# Altium PCB PCB1.PcbDoc
Units mil, origin at the board's own origin, x right, y up, seen from the top; angles counter-clockwise.
Board outline 6045 x 3600 mil, 2 copper layers (Top Layer, Bottom Layer); 64 components, 8 nets, 180 pads, 0 vias.
Unrouted connection lines stored in the file: 1.
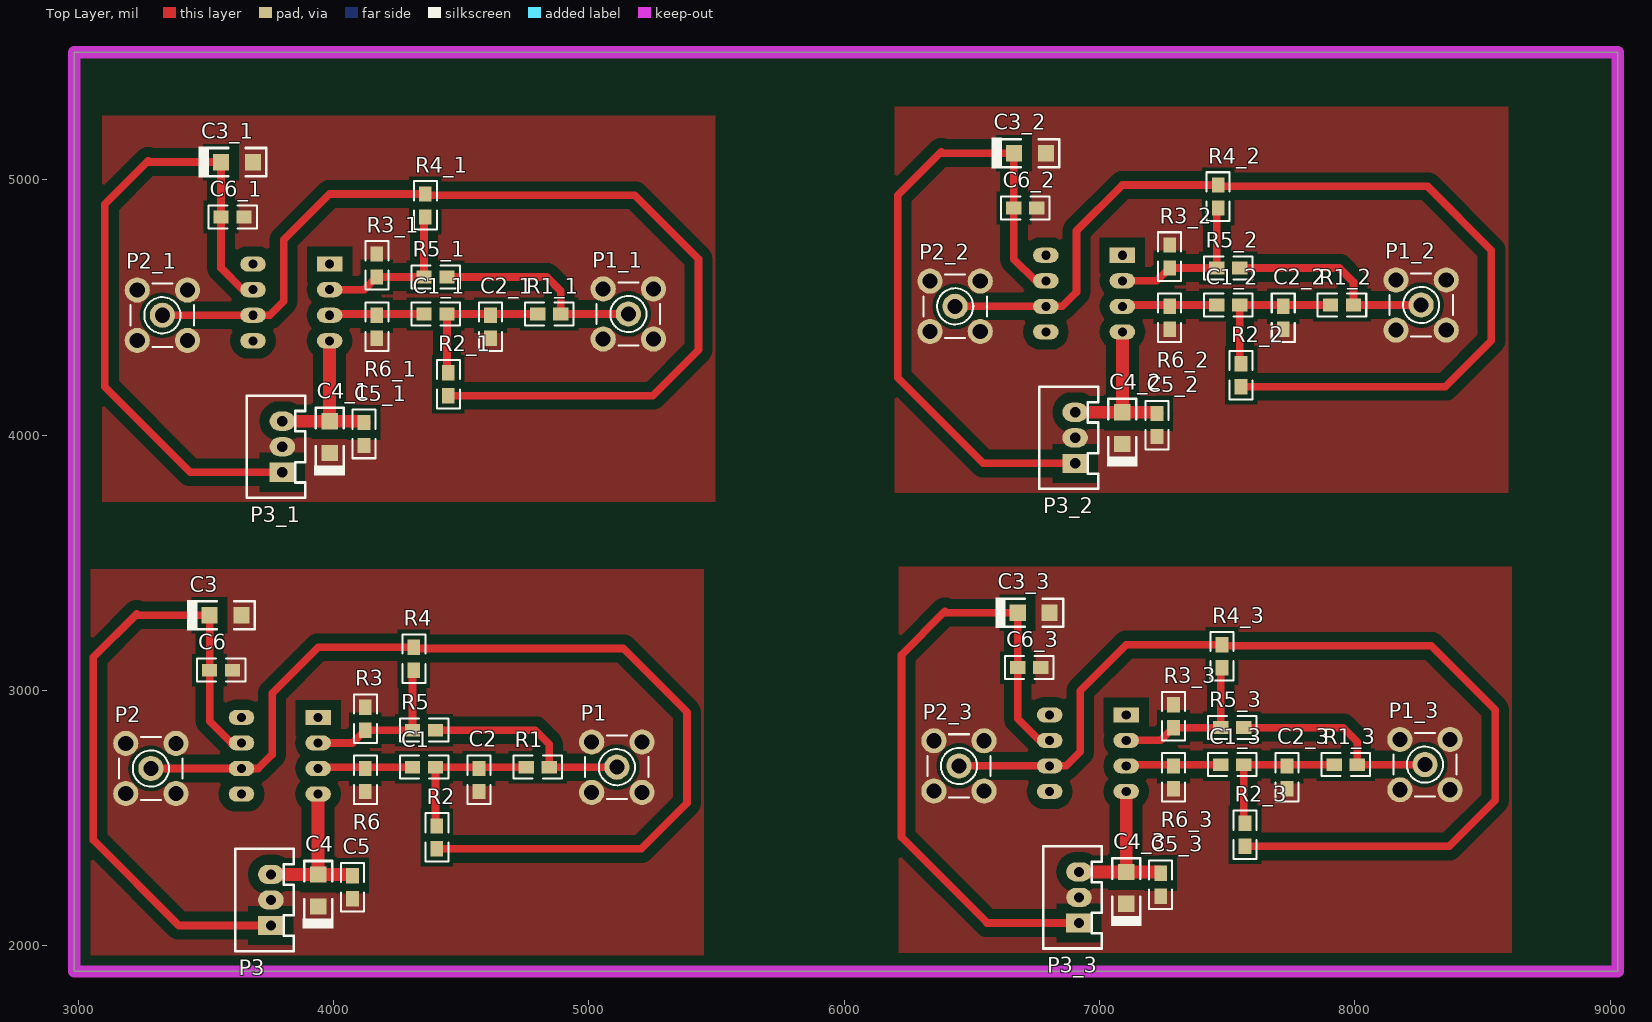
[diagram p0: Top Layer view]
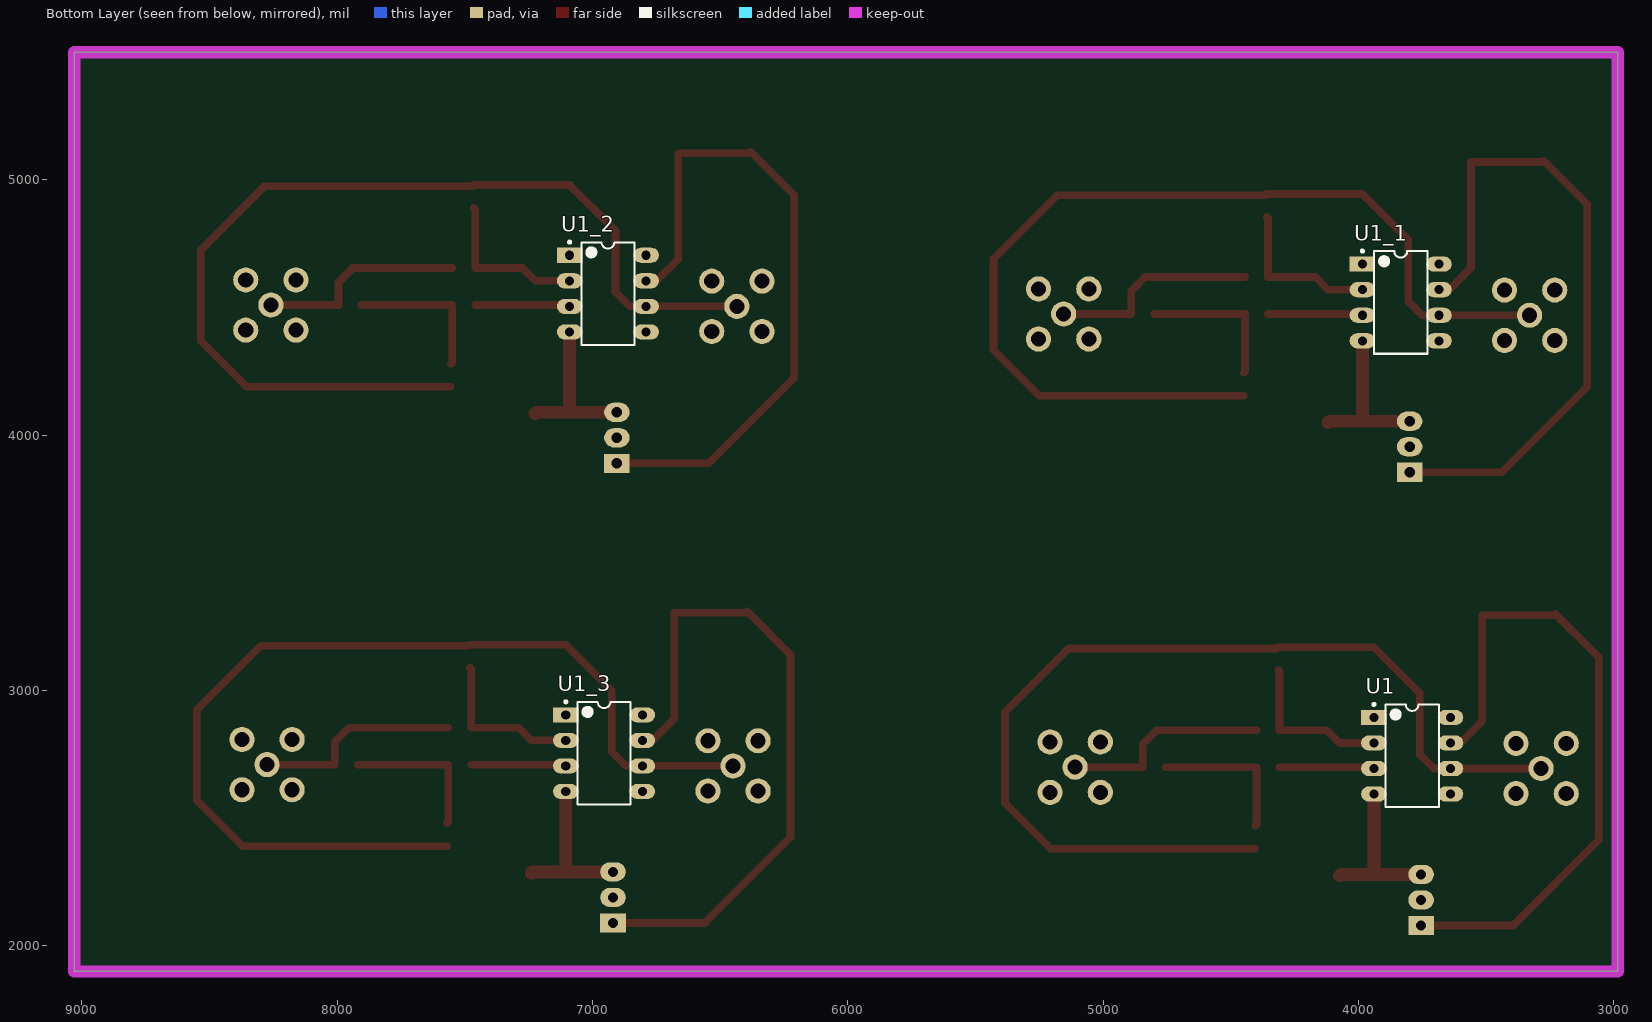
[diagram p1: Bottom Layer view, seen from below]

## Layer stack, top to bottom
Top Solder: solder mask 0.4, Solder Resist, Dk 3.5
Top Layer: signal copper 1.4
Dielectric 1: dielectric 12.6, FR-4, Dk 4.8
Bottom Layer: signal copper 1.4
Bottom Solder: solder mask 0.4, Solder Resist, Dk 3.5

## Board outline
2985,1900 2985,5500 9030,5500 9030,1900

## Design rules (kind name [scope] priority, off if disabled: settings)
Clearance [All] p1: gap=10 except(40: Arc-Fill Arc-Poly Track-Fill Track-Poly SMDPad-Fill SMDPad-Poly THPad-Fill THPad-Poly Via-Fill Via-Poly Fill-Fill Fill-Poly Poly-Poly)
PlaneConnect [All] p1: planeconnectstyle=Direct reliefexpansion=20 reliefentries=4 reliefconductorwidth=10 reliefairgap=10
PolygonConnect [All] p1: connectstyle=Direct reliefconductorwidth=10 reliefentries=4 polygonreliefangle="90 Angle" airgapwidth=10
RoutingVias [All] p1: holewidth=28 width=50 viastyle="Through Hole" minholewidth=28 minwidth=50 maxholewidth=28 maxwidth=50
SolderMaskExpansion [All] p1: expansion=4
Width [All] p1: maxlimit=100 minlimit=10 preferedwidth=10
29 further rules are at their usual default settings.

## Components (designator, comment, footprint, x,y, rotation, side; value= is the part's Value field where it differs from the comment)
C1 "0.1uf" 0805 4400,2700 r180 top
C1_1 "0.1uf" 0805 4445,4475 r180 top (schematic designator C1)
C1_2 "0.1uf" 0805 7550,4510 r180 top (schematic designator C1)
C1_3 "0.1uf" 0805 7565,2710 r180 top (schematic designator C1)
C2 "0.1uf" 0805 4570,2605 r90 top
C2_1 "0.1uf" 0805 4615,4380 r90 top (schematic designator C2)
C2_2 "0.1uf" 0805 7720,4415 r90 top (schematic designator C2)
C2_3 "0.1uf" 0805 7735,2615 r90 top (schematic designator C2)
C3 "Cap" 3216C-TYPE_A 3515,3295 r180 top
C3_1 "Cap" 3216C-TYPE_A 3560,5070 r180 top (schematic designator C3)
C3_2 "Cap" 3216C-TYPE_A 6665,5105 r180 top (schematic designator C3)
C3_3 "Cap" 3216C-TYPE_A 6680,3305 r180 top (schematic designator C3)
C4 "Cap" 3216C-TYPE_A 3940,2155 r270 top
C4_1 "Cap" 3216C-TYPE_A 3985,3930 r270 top (schematic designator C4)
C4_2 "Cap" 3216C-TYPE_A 7090,3965 r270 top (schematic designator C4)
C4_3 "Cap" 3216C-TYPE_A 7105,2165 r270 top (schematic designator C4)
C5 "0.1uf" 0805 4075,2275 r270 top
C5_1 "0.1uf" 0805 4120,4050 r270 top (schematic designator C5)
C5_2 "0.1uf" 0805 7225,4085 r270 top (schematic designator C5)
C5_3 "0.1uf" 0805 7240,2285 r270 top (schematic designator C5)
C6 "0.1uf" 0805 3515,3080 r0 top
C6_1 "0.1uf" 0805 3560,4855 r0 top (schematic designator C6)
C6_2 "0.1uf" 0805 6665,4890 r0 top (schematic designator C6)
C6_3 "0.1uf" 0805 6680,3090 r0 top (schematic designator C6)
P1 "SMB" SMB_V-RJ45 5110,2700 r0 top
P1_1 "SMB" SMB_V-RJ45 5155,4475 r0 top (schematic designator P1)
P1_2 "SMB" SMB_V-RJ45 8260,4510 r0 top (schematic designator P1)
P1_3 "SMB" SMB_V-RJ45 8275,2710 r0 top (schematic designator P1)
P2 "SMB" SMB_V-RJ45 3285,2695 r0 top
P2_1 "SMB" SMB_V-RJ45 3330,4470 r0 top (schematic designator P2)
P2_2 "SMB" SMB_V-RJ45 6435,4505 r0 top (schematic designator P2)
P2_3 "SMB" SMB_V-RJ45 6450,2705 r0 top (schematic designator P2)
P3 "XH2.54-3p" XH2.54-3p 3755,2080 r90 top
P3_1 "XH2.54-3p" XH2.54-3p 3800,3855 r90 top (schematic designator P3)
P3_2 "XH2.54-3p" XH2.54-3p 6905,3890 r90 top (schematic designator P3)
P3_3 "XH2.54-3p" XH2.54-3p 6920,2090 r90 top (schematic designator P3)
R1 "0" 0805 4845,2700 r180 top
R1_1 "0" 0805 4890,4475 r180 top (schematic designator R1)
R1_2 "0" 0805 7995,4510 r180 top (schematic designator R1)
R1_3 "0" 0805 8010,2710 r180 top (schematic designator R1)
R2 "0" 0805 4405,2470 r270 top
R2_1 "0" 0805 4450,4245 r270 top (schematic designator R2)
R2_2 "0" 0805 7555,4280 r270 top (schematic designator R2)
R2_3 "0" 0805 7570,2480 r270 top (schematic designator R2)
R3 "0" 0805 4125,2935 r270 top
R3_1 "0" 0805 4170,4710 r270 top (schematic designator R3)
R3_2 "0" 0805 7275,4745 r270 top (schematic designator R3)
R3_3 "0" 0805 7290,2945 r270 top (schematic designator R3)
R4 "0" 0805 4315,3080 r90 top
R4_1 "0" 0805 4360,4855 r90 top (schematic designator R4)
R4_2 "0" 0805 7465,4890 r90 top (schematic designator R4)
R4_3 "0" 0805 7480,3090 r90 top (schematic designator R4)
R5 "0" 0805 4400,2845 r180 top
R5_1 "0" 0805 4445,4620 r180 top (schematic designator R5)
R5_2 "0" 0805 7550,4655 r180 top (schematic designator R5)
R5_3 "0" 0805 7565,2855 r180 top (schematic designator R5)
R6 "0" 0805 4125,2605 r90 top
R6_1 "0" 0805 4170,4380 r90 top (schematic designator R6)
R6_2 "0" 0805 7275,4415 r90 top (schematic designator R6)
R6_3 "0" 0805 7290,2615 r90 top (schematic designator R6)
U1 "OP07" TI-JG8 3790,2745 r180 bottom
U1_1 "OP07" TI-JG8 3835,4520 r180 bottom (schematic designator U1)
U1_2 "OP07" TI-JG8 6940,4555 r180 bottom (schematic designator U1)
U1_3 "OP07" TI-JG8 6955,2755 r180 bottom (schematic designator U1)

## Footprints (in the part's own frame and the unit in brackets; to place one, negate y for a bottom-side part, rotate by r counter-clockwise, add the part's x,y. Pads: shape width x height; smd on the part's side, far side on the other; paste and mask are expansions set on the pad)
0805 [mil]
  rect 60x50 smd: 1(0,0) 2(90,0)
  silkscreen extent -50,-45 140,45
3216C-TYPE_A [mm]
  rect 1.6x1.65 smd: 1(0,0) 2(-3.175,0)
  silkscreen extent -4.51,-1.54 2.22,1.52
SMB_V-RJ45 [mm] "Connector; SMB Straight"
  round 2.5 hole 1.5: 1(0,0) 2(-2.5,-2.5) 2(-2.5,2.5) 2(2.5,-2.5) 2(2.5,2.5)
  silkscreen extent -3.15,-3.15 3.15,3.15
TI-JG8 [mm] "DIP, 8-Leads, Body 10.15x7.1mm, Pitch 2.54mm"
  rect 2.54x1.5 hole 0.9: 1(-3.81,3.81)
  oval 2.54x1.5 hole 0.9: 2(-3.81,1.27) 3(-3.81,-1.27) 4(-3.81,-3.81) 5(3.81,-3.81) 6(3.81,-1.27) 7(3.81,1.27) 8(3.81,3.81)
  silkscreen extent -3.94,-5.1 2.65,5.23, body extent -3.95,-5.07 3.95,5.07, height 5.08
XH2.54-3p [mil]
  rect 75x100 hole 40: 1(0,0)
  oval 75x100 hole 40: 2(100,0) 3(200,0)
  silkscreen extent -100,-90 300,140

## Part data
C1 C1_1 C1_2 C1_3 C2 C2_1 C2_2 C2_3 C5 C5_1 C5_2 C5_3 C6 C6_1 C6_2 C6_3: library part Cap
C3 C3_1 C3_2 C3_3 C4 C4_1 C4_2 C4_3: library part "Tantalium Cap"
P1 P1_1 P1_2 P1_3 P2 P2_1 P2_2 P2_3: "SMB Straight Connector"
R1 R1_1 R1_2 R1_3 R2 R2_1 R2_2 R2_3 R3 R3_1 R3_2 R3_3 R4 R4_1 R4_2 R4_3 R5 R5_1 R5_2 R5_3 R6 R6_1 R6_2 R6_3: library part Res

## Nets (pads, with @x,y where several pads share a name; then routed paths per layer and width w, separated by ;. In a path a pad name is that pad's centre, name@x,y a point inside that pad or via, vN(x,y) a via of type N, cw(c..) or ccw(c..) an arc to the next point about the centre after c; other vN are vias at no path point)
5V: C3.1 C6.1 P3.1 U1.7 | length 2651.5
  Top Layer w30: U1.7 3600,2795 3515,2880 C6.1 C3.1 3235,3295 3230,3300 3060,3130 3060,2415 3395,2080 P3.1
-5V: C4.2 C5.1 P3.3 U1.4 | length 637.1
  Top Layer w50: P3.3 C4.2 ; U1.4 C4.2 ; C5.1 4070,2280 C4.2
GND: C2.1 C3.2 C4.1 C5.2 C6.2 P1.2 P2.2 P3.2 R3.1 R6.1
NetC1_1: C1.1 C2.2 R1.2 R2.1 | length 587.1
  Top Layer w30: R2.1 4400,2475 C1.1 R1.2
NetC1_2: C1.2 R6.2 U1.3 | length 372.1
  Top Layer w30: U1.3 3945,2700 C1.2
NetP1_1: P1.1 R1.1 R5.1 | length 822.8
  Top Layer w30: R5.1 4790,2845 4845,2790 R1.1 P1.1
NetP2_1: P2.1 R2.2 R4.2 U1.6 | length 3952.5
  Top Layer w30: P2.1 U1.6 3705,2695 3760,2750 3760,2990 3940,3170 R4.2 4320,3165 5135,3165 5385,2915 5385,2560 5205,2380 R2.2
NetR3_2: R3.2 R4.1 R5.2 U1.2 | length 627.8
  Top Layer w30: U1.2 4075,2795 R3.2 R5.2 4310,3075 R4.1
pads on no net: C1_1.1 C1_1.2 C1_2.1 C1_2.2 C1_3.1 C1_3.2 C2_1.1 C2_1.2 C2_2.1 C2_2.2 C2_3.1 C2_3.2 C3_1.1 C3_1.2 C3_2.1 C3_2.2 C3_3.1 C3_3.2 C4_1.1 C4_1.2 C4_2.1 C4_2.2 C4_3.1 C4_3.2 C5_1.1 C5_1.2 C5_2.1 C5_2.2 C5_3.1 C5_3.2 C6_1.1 C6_1.2 C6_2.1 C6_2.2 C6_3.1 C6_3.2 P1_1.1 P1_1.2 P1_2.1 P1_2.2 P1_3.1 P1_3.2 P2_1.1 P2_1.2 P2_2.1 P2_2.2 P2_3.1 P2_3.2 P3_1.1 P3_1.2 P3_1.3 P3_2.1 P3_2.2 P3_2.3 P3_3.1 P3_3.2 P3_3.3 R1_1.1 R1_1.2 R1_2.1 R1_2.2 R1_3.1 R1_3.2 R2_1.1 R2_1.2 R2_2.1 R2_2.2 R2_3.1 R2_3.2 R3_1.1 R3_1.2 R3_2.1 R3_2.2 R3_3.1 R3_3.2 R4_1.1 R4_1.2 R4_2.1 R4_2.2 R4_3.1 R4_3.2 R5_1.1 R5_1.2 R5_2.1 R5_2.2 R5_3.1 R5_3.2 R6_1.1 R6_1.2 R6_2.1 R6_2.2 R6_3.1 R6_3.2 U1.1 U1.5 U1.8 U1_1.1 U1_1.2 U1_1.3 U1_1.4 U1_1.5 U1_1.6 U1_1.7 U1_1.8 U1_2.1 U1_2.2 U1_2.3 U1_2.4 U1_2.5 U1_2.6 U1_2.7 U1_2.8 U1_3.1 U1_3.2 U1_3.3 U1_3.4 U1_3.5 U1_3.6 U1_3.7 U1_3.8
copper on no net: | length 28952.3
  Top Layer w30: 3330,4470 3685,4470 3750,4470 3805,4525 3805,4765 3985,4945 4360,4945 4365,4940 5180,4940 5430,4690 5430,4335 5250,4155 4450,4155 ; 3685,4570 3645,4570 3560,4655 3560,4855 3560,5070 3280,5070 3275,5075 3105,4905 3105,4190 3440,3855 3800,3855 ; 3985,4470 3990,4475 4355,4475 ; 3985,4570 4120,4570 4170,4620 4355,4620 4355,4850 4360,4855 ; 4445,4620 4835,4620 4890,4565 4890,4475 5155,4475 ; 4450,4245 4445,4250 4445,4475 4800,4475 ; 6435,4505 6790,4505 6855,4505 6910,4560 6910,4800 7090,4980 7465,4980 7470,4975 8285,4975 8535,4725 8535,4370 8355,4190 7555,4190 ; 6450,2705 6805,2705 6870,2705 6925,2760 6925,3000 7105,3180 7480,3180 7485,3175 8300,3175 8550,2925 8550,2570 8370,2390 7570,2390 ; 6790,4605 6750,4605 6665,4690 6665,4890 6665,5105 6385,5105 6380,5110 6210,4940 6210,4225 6545,3890 6905,3890 ; 6805,2805 6765,2805 6680,2890 6680,3090 6680,3305 6400,3305 6395,3310 6225,3140 6225,2425 6560,2090 6920,2090 ; 7090,4505 7095,4510 7460,4510 ; 7090,4605 7225,4605 7275,4655 7460,4655 7460,4885 7465,4890 ; 7105,2705 7110,2710 7475,2710 ; 7105,2805 7240,2805 7290,2855 7475,2855 7475,3085 7480,3090 ; 7550,4655 7940,4655 7995,4600 7995,4510 8260,4510 ; 7555,4280 7550,4285 7550,4510 7905,4510 ; 7565,2855 7955,2855 8010,2800 8010,2710 8275,2710 ; 7570,2480 7565,2485 7565,2710 7920,2710
  Top Layer w50: 3800,4055 3985,4055 ; 3985,4370 3985,4055 ; 4120,4050 4115,4055 3985,4055 ; 6905,4090 7090,4090 ; 6920,2290 7105,2290 ; 7090,4405 7090,4090 ; 7105,2605 7105,2290 ; 7225,4085 7220,4090 7090,4090 ; 7240,2285 7235,2290 7105,2290

## Polygon pours and split planes (outlines as drawn)
no net on Top Layer "Top Layer-No Net" (solid, pour order 6): 6146.19,3549.64 6146.19,1919.64 8666.19,1919.64 8676.19,1909.64 8676.19,3549.64
no net on Top Layer "Top Layer-No Net" (solid, pour order 4): 6131.19,5349.64 6131.19,3719.64 8651.19,3719.64 8661.19,3709.64 8661.19,5349.64
no net on Top Layer "Top Layer-No Net" (solid, pour order 2): 3026.19,5314.64 3026.19,3684.64 5546.19,3684.64 5556.19,3674.64 5556.19,5314.64
GND on Top Layer "Top Layer-No Net" (solid, pour order 0): 2981.19,3539.64 2981.19,1909.64 5501.19,1909.64 5511.19,1899.64 5511.19,3539.64

## Keep-outs
Keep-Out Layer:
  the board outline again, w47.24